# Altium PCB Main.PcbDoc
Units mm, origin at the board's own origin, x right, y up, seen from the top; angles counter-clockwise.
Board outline 140 x 40 mm, 2 copper layers (Top Layer, Bottom Layer), stack 1.54 mm thick; 1 components, 0 nets, 1 pads, 0 vias.
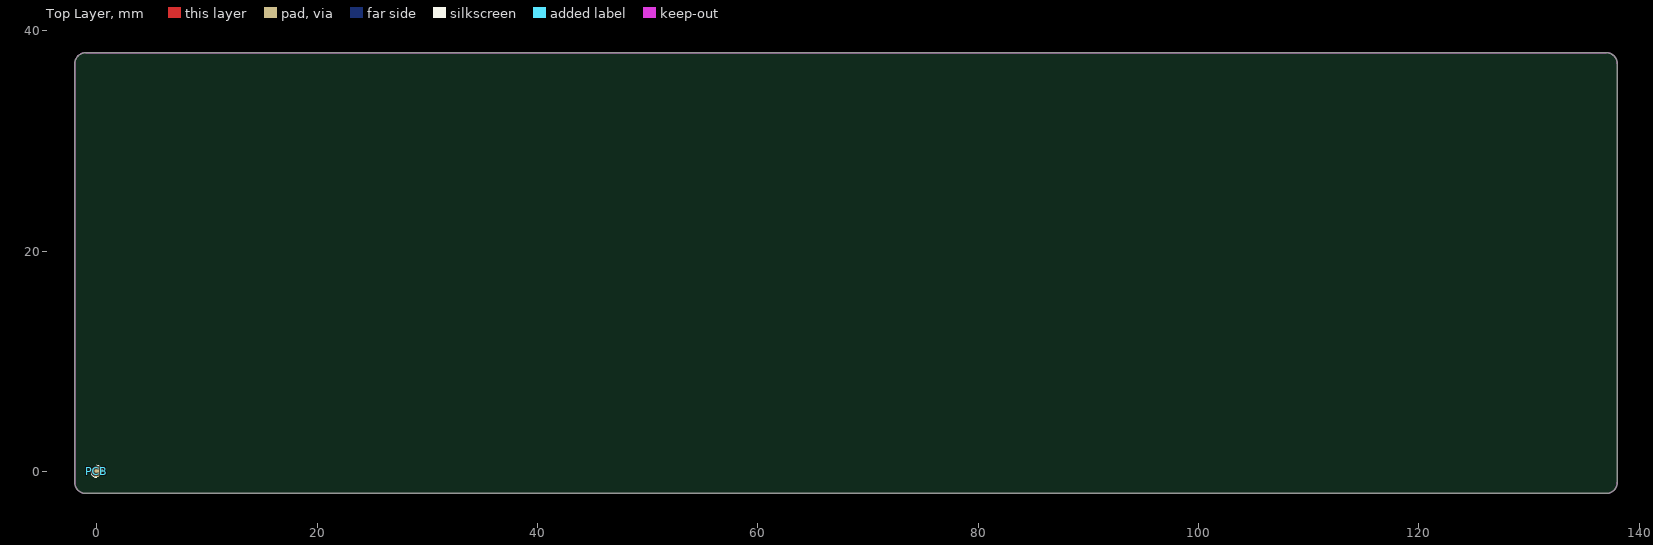
[diagram p0: Top Layer view]
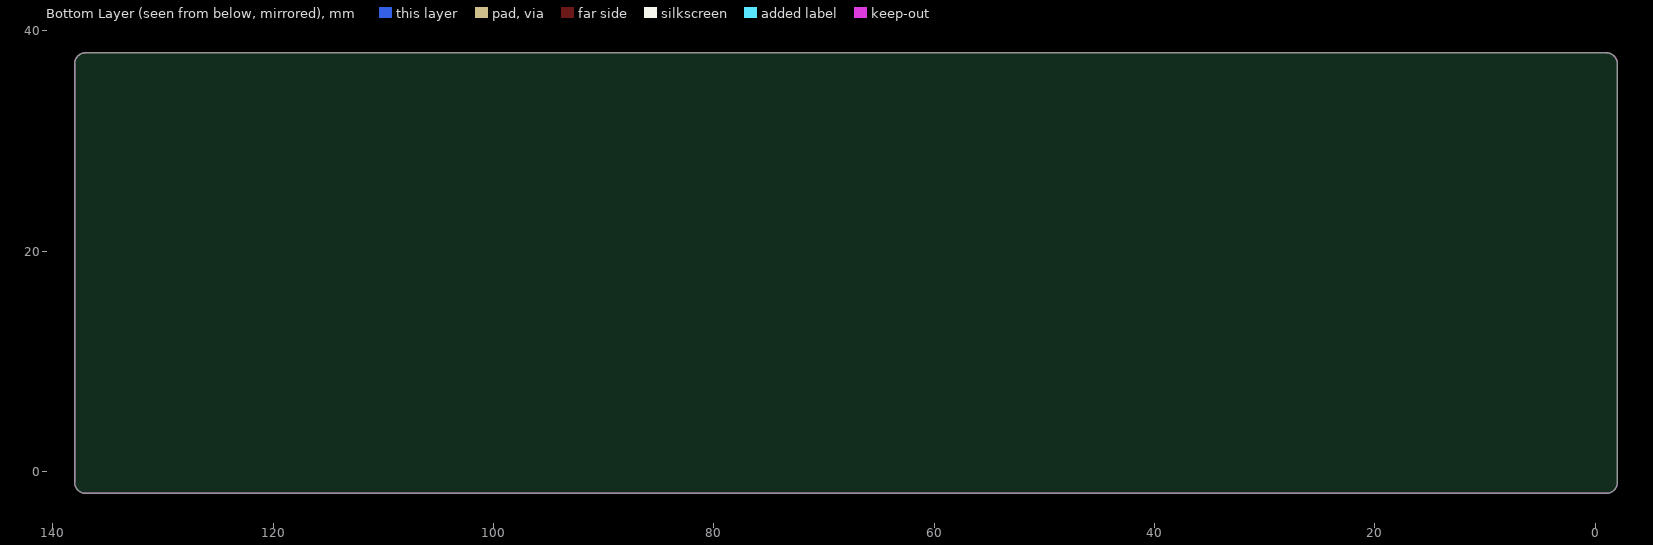
[diagram p1: Bottom Layer view, seen from below]

## Layer stack, top to bottom
Top Solder: solder mask 0.01, Solder Resist, Dk 3.5
Top Layer: signal copper 0.035
Dielectric 1: dielectric 1.47, FR-4, Dk 4.8
Bottom Layer: signal copper 0.035
Bottom Solder: solder mask 0.01, Solder Resist, Dk 3.5

## Board outline
-1,-2 137,-2 ccw(c137,-1) 138,-1 138,37 ccw(c137,37) 137,38 -1,38 ccw(c-1,37) -2,37 -2,-1 ccw(c-1,-1)

## Design rules (kind name [scope] priority, off if disabled: settings)
Clearance [All] p1: gap=0.25 ignorepadtopadclearanceinfootprint=FALSE except(0: Arc-Hole Track-Hole SMDPad-Hole THPad-Hole Via-Hole Fill-Hole Poly-Hole Region-Hole Text-Hole; 0.15: Track-SMDPad SMDPad-Poly Via-Poly)
ComponentClearance [All] p1: gap=0.2 collisioncheckmode=3 verticalgap=0.2 showdistances=FALSE
MinimumSolderMaskSliver [All] p1: minsoldermaskwidth=0.1
PolygonConnect PolygonConnectVia [All vs IsVia] p1: connectstyle=Direct reliefconductorwidth=0.254 reliefentries=4 polygonreliefangle="90 Angle" airgapwidth=0.254
PolygonConnect [All vs IsPad] p2: connectstyle=Relief reliefconductorwidth=0.15 reliefentries=4 polygonreliefangle="90 Angle" airgapwidth=0.15
RoutingVias [All] p1: holewidth=0.4 width=1 viastyle="Through Hole" minholewidth=0.2 minwidth=0.45 maxholewidth=0.7 maxwidth=1.5
SilkToSilkClearance [All] p1: silktosilkclearance=0.1
SilkToSolderMaskClearance [IsPad] p1: minsilkscreentomaskgap=0.1 clearancetoexposedcopper=TRUE
SolderMaskExpansion [All] p1: expansion=0.05
Width [All] p1: maxlimit=1 minlimit=0.15 preferedwidth=0.3 minimp=50.000000 maximp=50.000000 favimp=50.000000
26 further rules are at their usual default settings.

## Components (designator, comment, footprint, x,y, rotation, side; value= is the part's Value field where it differs from the comment)
PCB "PCB" FIDUCIAL 0,0 r0 top

## Footprints (in the part's own frame and the unit in brackets; to place one, negate y for a bottom-side part, rotate by r counter-clockwise, add the part's x,y. Pads: shape width x height; smd on the part's side, far side on the other; paste and mask are expansions set on the pad)
FIDUCIAL [mm] "InGun Receptable KS100"
  round 1 smd paste-1 mask-0.05: 1(0,0)
  silkscreen extent -0.54,-0.54 0.54,0.54

## Part data
PCB: "Printed CIrcuit Board", LatestRevisionDate=17-Jul-2002, LatestRevisionNote="Re-released for DXP Platform.", Publisher="Altium Limited"

## Nets (pads, with @x,y where several pads share a name; then routed paths per layer and width w, separated by ;. In a path a pad name is that pad's centre, name@x,y a point inside that pad or via, vN(x,y) a via of type N, cw(c..) or ccw(c..) an arc to the next point about the centre after c; other vN are vias at no path point)
pads on no net: PCB.1

## Keep-outs
Keep-Out Layer:
  the board outline again, w0.1

## Silkscreen, mask and mechanical layers (free items; w line width, h text height)
Route Tool Path:
  lines w2: -3,37 ccw(c-1,37) -3,37 ; -3,37 cw(c-1,37) -1.003,39 ; -3,37 -3,-1 ccw(c-1,-1) -1.006,-3 ; -1.006,-3 ccw(c-1,-2) -1,-3 ; -1.006,-3 ccw(c-1,-1) -1,-3 ; -1.003,39 cw(c-1,37) -1,39 ; -1.003,39 cw(c-1,38) -1,39 ; -1,-3 ccw(c-1,-2) -1,-3 ; -1,-3 137,-3 ; -1,39 ccw(c-1,37) -1,39 ; -1,39 137,39 ; 137,-3 ccw(c137,-1) 139,-1.005 ; 137,-3 137,-3 ; 137,-3 137,-3 ; 137,39 cw(c137,38) 137.006,39 ; 137,39 cw(c137,37) 137.006,39 ; 137.006,39 cw(c137,37) 139,37.003 ; 139,-1.005 ccw(c137,-1) 139,-1 ; 139,-1.005 ccw(c138,-1) 139,-1 ; 139,-1 139,37 ; 139,37 ccw(c137,37) 139,37.003 ; 139,37 ccw(c138,37) 139,37.003
Contour:
  the board outline again, w0.1